# Altium PCB iTag3.PcbDoc
Units mil, origin at the board's own origin, x right, y up, seen from the top; angles counter-clockwise.
Board outline 1810 x 710 mil, 4 copper layers (Top Layer, Internal Plane 1, Internal Plane 2, Bottom Layer), stack 30.634 mil thick; 53 components, 41 nets, 244 pads, 24 vias.
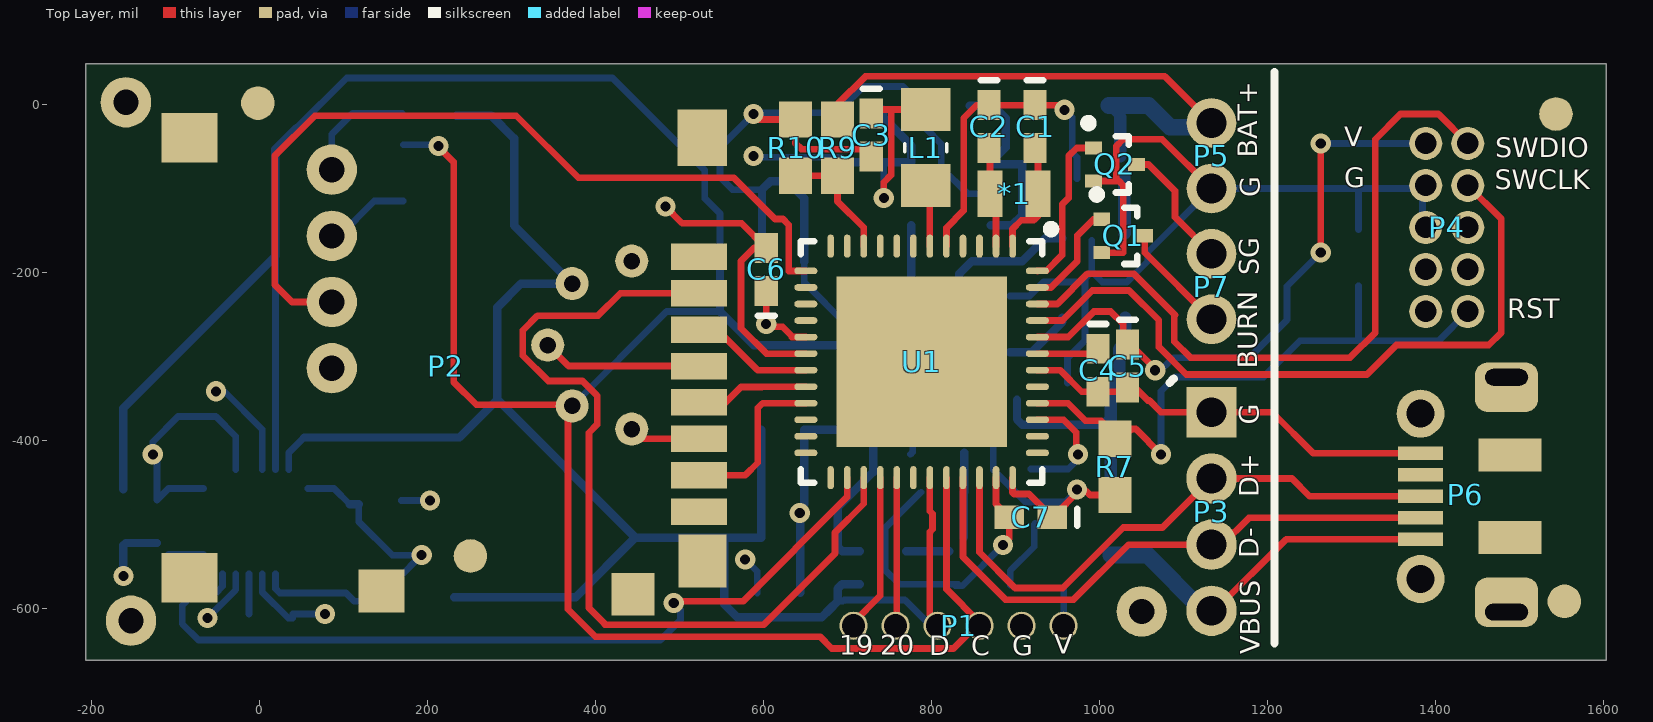
[diagram p0: Top Layer view]
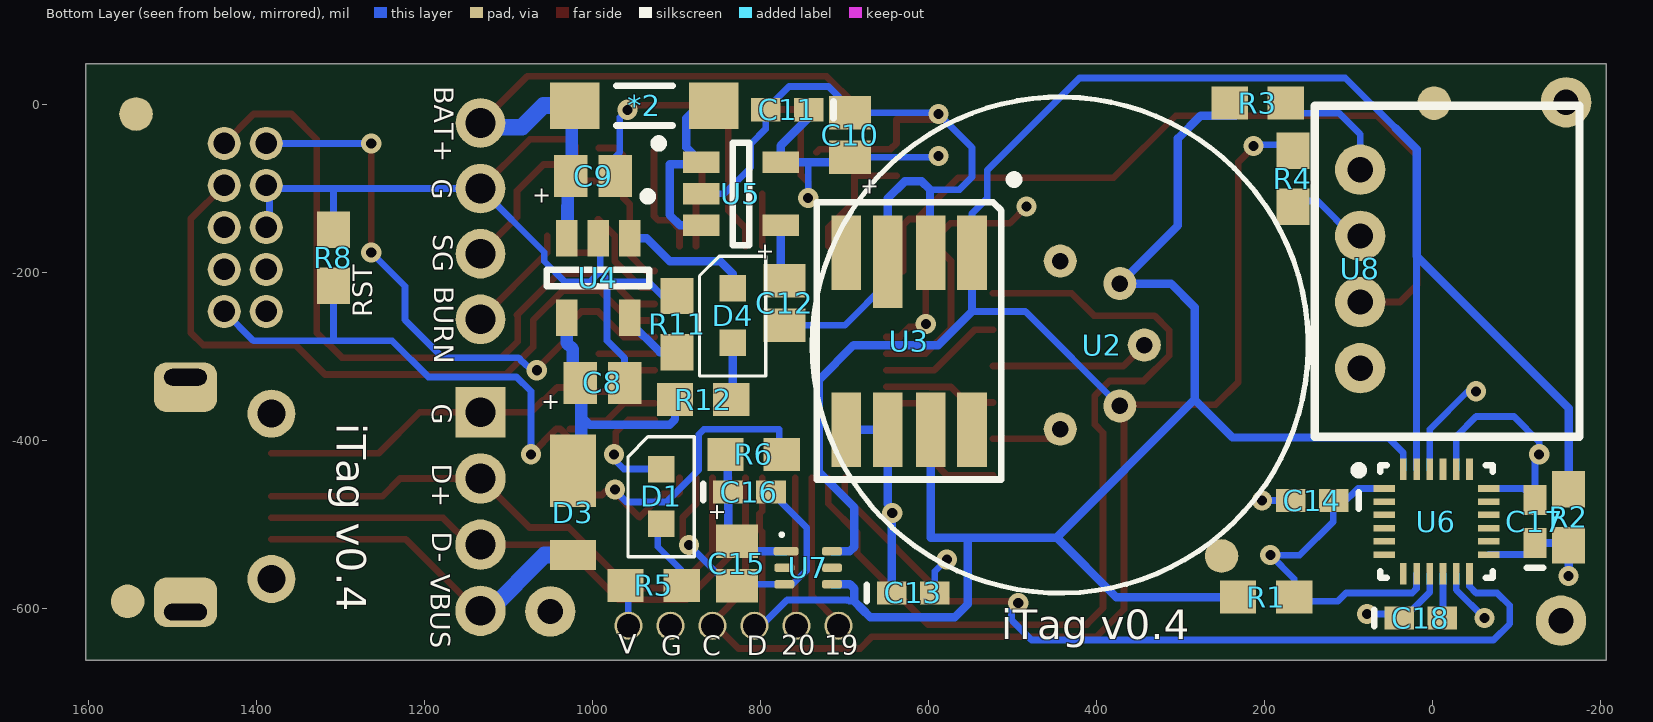
[diagram p1: Bottom Layer view, seen from below]
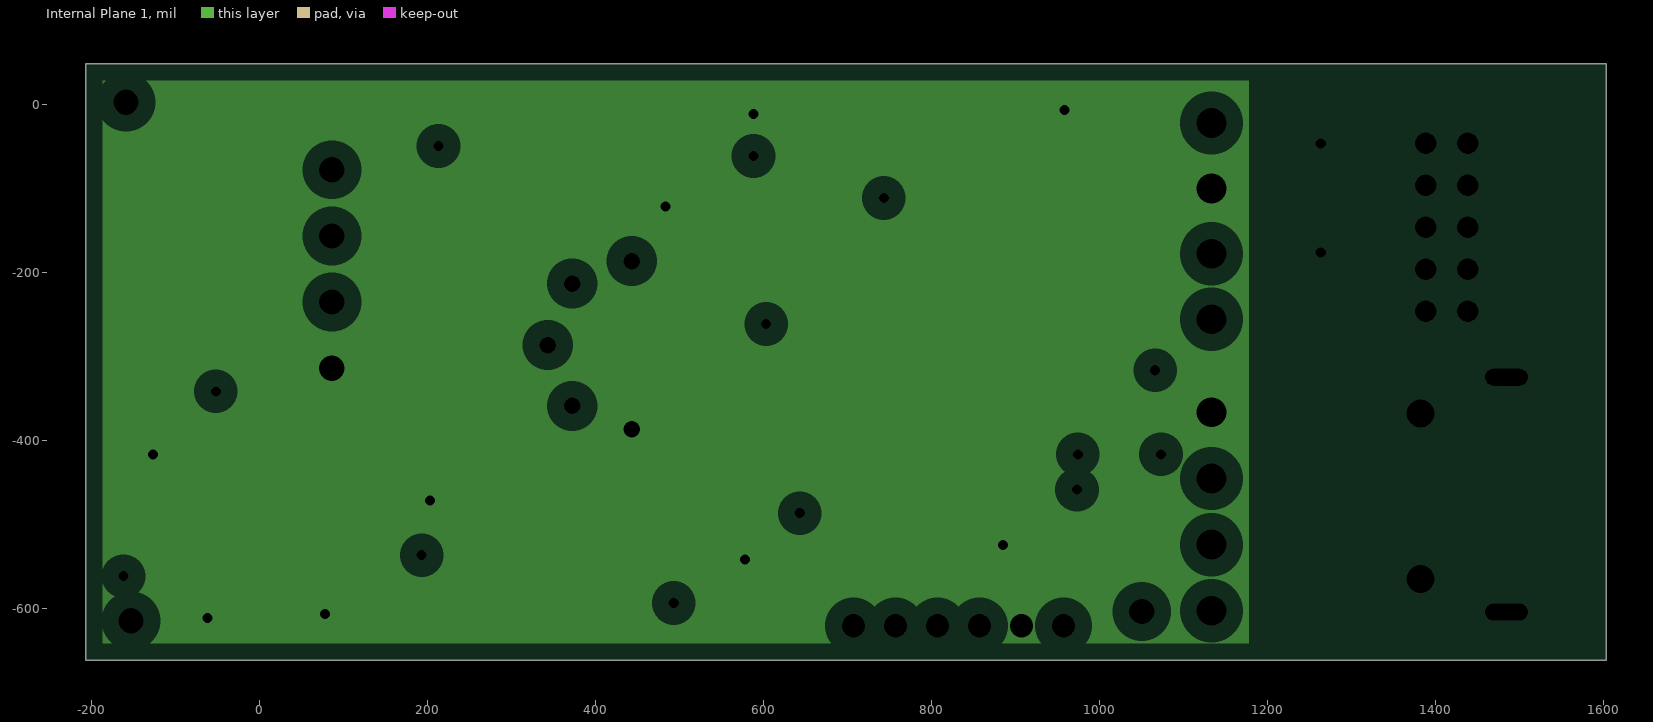
[diagram p2: Internal Plane 1, clearances drawn from the general rule]
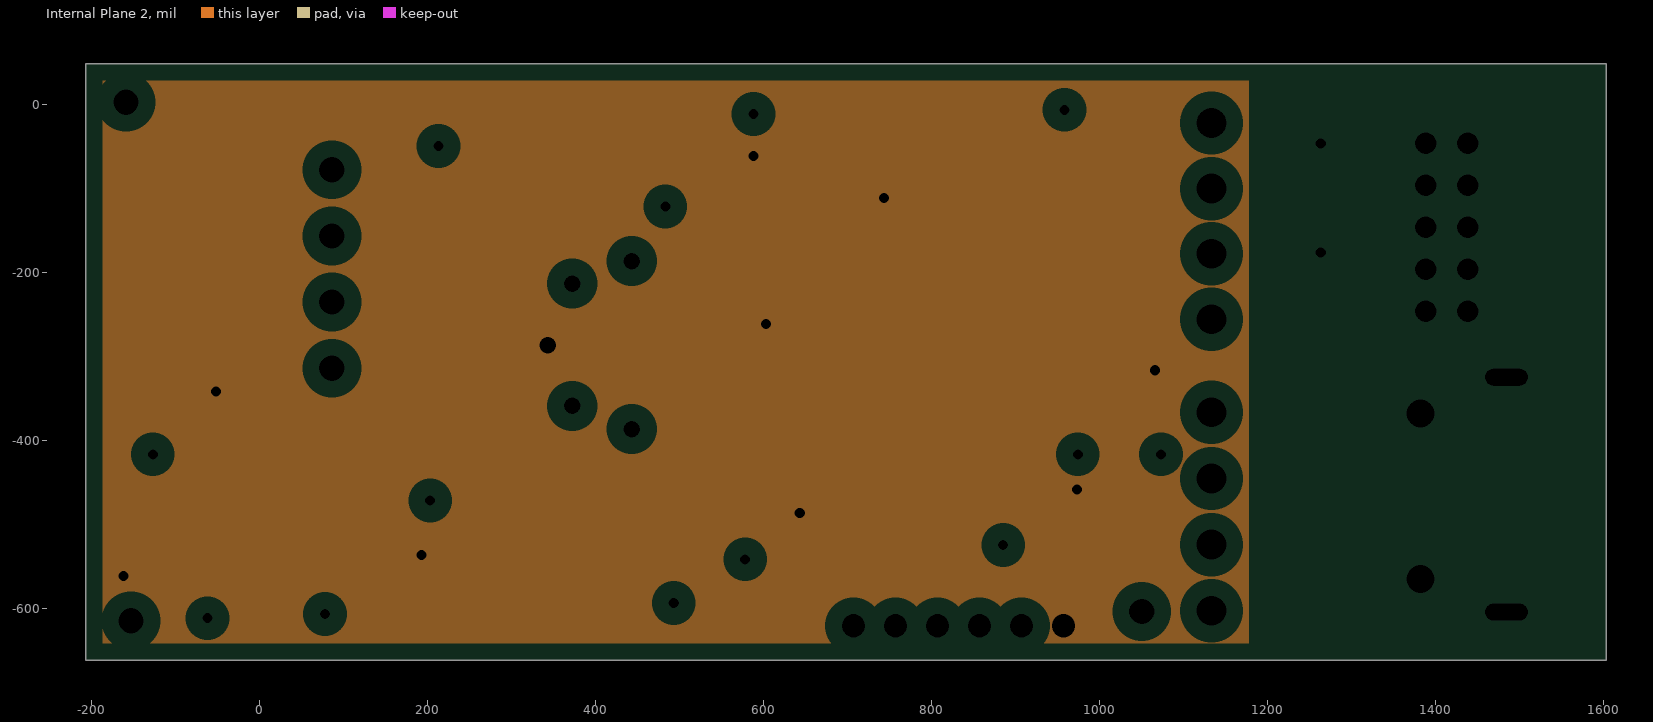
[diagram p3: Internal Plane 2, clearances drawn from the general rule]

## Layer stack, top to bottom
Top Solder: solder mask 0.4, Solder Resist, Dk 3.5
Top Layer: signal copper 1.4
Dielectric 1: core 10, FR-4, Dk 4.2
Internal Plane 1: plane copper 1.417, net GND
Dielectric 3: prepreg 5, Dk 4.2
Internal Plane 2: plane copper 1.417, net VCC
Dielectric 2: core 10, Dk 4.2
Bottom Layer: signal copper 1.4
Bottom Solder: solder mask 0.4, Solder Resist, Dk 3.5

## Board outline
-207,-661 -207,49 1603,49 1603,-661

## Design rules (kind name [scope] priority, off if disabled: settings)
Clearance [All] p1: gap=6
PlaneClearance [All] p1: clearance=20
PlaneConnect [All] p1: planeconnectstyle=Relief reliefexpansion=20 reliefentries=4 reliefconductorwidth=10 reliefairgap=10
PolygonConnect [All] p1: connectstyle=Relief reliefconductorwidth=10 reliefentries=4 polygonreliefangle="90 Angle" airgapwidth=10
RoutingVias [All] p1: holewidth=28 width=50 viastyle="Through Hole" minholewidth=28 minwidth=50 maxholewidth=28 maxwidth=50
SolderMaskExpansion [All] p1: expansion=4
Width [All] p1: maxlimit=50 minlimit=6 preferedwidth=8
27 further rules are at their usual default settings.

## Classes and differential pairs
component class iTag3: *1 *2 C1 C2 C3 C4 C5 C6 C7 C8 C9 C10 C11 C12 D3 D4 L1 P2 P3 P4 P5 P6 P7 Q1 Q2 R1 R2 R7 R8 R9 R10 R11 R12 U1 U4 U5
component class iTag3Sensors2: C13 C14 C15 C16 C17 C18 D1 P1 R3 R4 R5 R6 U2 U3 U6 U7 U8

## Components (designator, comment, footprint, x,y, rotation, side; value= is the part's Value field where it differs from the comment)
*1 "XTAL_ABS06" XTAL-ABS06 898,-106 r0 top
*2 "Reed_MK24" "Reed MK24-B-3" 938,-1 r180 bottom
C1 "12.5" 0402 923,-26 r270 top
C2 "12.5" 0402 868,-26 r270 top
C3 "0.1uF" 0402 728,-36 r270 top
C4 "0.1uF" 0402 998,-316 r270 top
C5 "0.1uF" 0402 1033,-311 r270 top
C6 "0.1 uF" 0402 603,-196 r90 top
C7 "0.1 uF" 0402 918,-491 r180 top
C8 "1uF" Tant0805 988,-331 r0 bottom
C9 "1uF" Tant0805 999,-85 r0 bottom
C10 "10uF" Tant0805 693,-36 r270 bottom
C11 "0.1uF" 0402 768,-6 r0 bottom
C12 "1uF" Tant0805 771,-236 r90 bottom
C13 "0.1uF" 0402 618,-581 r180 bottom
C14 "0.1uF" 0402 143,-471 r0 bottom
C15 "1uF" Tant0805 828,-546 r90 bottom
C16 "0.1uF" 0402 813,-461 r180 bottom
C17 "10nF" 0402 -122,-496 r90 bottom
C18 "0.1uF" 0402 14,-611 r180 bottom
D1 "LED_0603" Diode0603 918,-466 r90 bottom
D3 "Shottky" DFLS130 1023,-471 r270 bottom
D4 "LED_0603" Diode0603 833,-251 r90 bottom
L1 "300Ohm" "0805 (M2125) Ferrite" 793,-51 r90 top
P1 "Header 6x1 1.27mm" "Header6x1 1.27mm" 957,-620 r90 top
P2 "microSD reverse" miroSD_reverse 523,-181 r90 top
P3 "HDR_4x1_2mm" Hdr_4x1_2mm 1133,-366 r180 top
P4 "Cortex Debug" Header_2x5_50mil 1388,-246 r0 top
P5 "HDR_2x1_2mm" HDR_2x1_2mm 1133,-21 r180 top
P6 "microUSB" microUSB-B 1433,-466 r90 top
P7 "HDR_2x1_2mm" HDR_2x1_2mm 1133,-256 r0 top
Q1 "DMN5L06TK-7" SOT-523 1028,-156 r0 top
Q2 "DMN5L06TK-7" SOT-523 1018,-71 r0 top
R1 "4.7k" 3-0603 198,-586 r0 bottom
R2 "4.7k" 3-0603 -162,-491 r270 bottom
R3 "100X" 3-0603 208,2 r0 bottom
R4 "100X" 3-0603 166,-88 r90 bottom
R5 "330X" 3-0603 927,-572 r180 bottom
R6 "100x" 3-0603 808,-416 r0 bottom
R7 "10K" 3-0603 1018,-431 r90 top
R8 "Do not place" 3-0603 1308,-182 r90 bottom
R9 "100k" 3-0603 688,-51 r90 top
R10 "100k" 3-0603 638,-51 r270 top
R11 "10k" 3-0603 899,-261 r270 bottom
R12 "330X" 3-0603 868,-351 r180 bottom
U1 "ATSAMD21GA-MUT" QFN127P600-8N 788,-306 r270 top
U2 "Keller7LD" Keller7LD 443,-386 r90 bottom
U3 "MS5803_Press" MS5803_Press 548,-176 r270 bottom
U4 "MCP73831T-2DCI/OT" SOT-23-OT5_N 993,-206 r270 bottom
U5 "LP3985IM5-3.3" MF05A_N 823,-106 r180 bottom
U6 "MPU9250" MPU6500 -4.72,-496 r180 bottom
U7 "RGB light" ODFN 743,-551 r180 bottom
U8 "PRESENS O2 CUBE" PRESENS_O2 140,-395 r90 bottom

## Footprints (in the part's own frame and the unit in brackets; to place one, negate y for a bottom-side part, rotate by r counter-clockwise, add the part's x,y. Pads: shape width x height; smd on the part's side, far side on the other; paste and mask are expansions set on the pad)
3-0603 [mm] "Chip Resistor; Body 1.6 x 0.9 mm (LxW typ)"
  rect 1.1x1 smd: 1(-0.85,0) 2(0.85,0)
0402 [mm] "Chip Capacitor; Body 1.0 x 0.5 mm (LxW typ)"
  rect 0.9x0.7 smd: 1(-0.65,0) 2(0.65,0)
  silkscreen extent -1.4,-0.25 -1.4,0.25
"0805 (M2125) Ferrite" [mm] "Chip Resistor; Body 2.0 x 1.3 mm (LxW typ)"
  rect 1.3x1.5 smd: 1(-1.15,0) 2(1.15,0)
  silkscreen extent -0.13,-0.64 0.13,0.64, body extent -1.15,-0.72 1.15,0.73, height 0.81
DFLS130 [mm] "Diode"
  rect 0.9x1.4 smd: A(1.65,0)
  rect 2.2x1.4 smd: K(-0.9,0)
Diode0603 [mm]
  rect 0.8x0.8 smd: A(-0.825,0) K(0.825,0)
  silkscreen extent -1.83,-1 1.8,1
HDR_2x1_2mm [mm]
  round 1.5 hole 0.9: 1(0,0.016) 2(0,2)
Hdr_4x1_2mm [mil]
  rect 60x60 hole 35.43: 1(0,0)
  round 60 hole 35.43: 2(0,78.74) 3(0,157.48) 4(0,236.22)
  silkscreen extent 45,-40 50,-35
"Header6x1 1.27mm" [mm]
  round 0.85 hole 0.7: 1(0,0) 2(0,1.27) 3(0,2.54) 4(0,3.81) 5(0,5.08) 6(0,6.35)
Header_2x5_50mil [mm]
  round 1 hole 0.65: 1(0,0) 2(1.27,0) 3(0,1.27) 4(1.27,1.27) 5(0,2.54) 6(1.27,2.54) 7(0,3.81) 8(1.27,3.81) 9(0,5.08) 10(1.27,5.08)
Keller7LD [mm]
  round 1 hole 0.5: 1(5.08,0) 2(4.4,-1.8) 3(2.54,-2.54) 4(0.7,-1.8) 5(0,0)
  silkscreen extent -4.96,-7.5 10.04,7.5, body extent -4.94,-7.49 10,7.49, height 5.25
MF05A_N [mm] "SOT23, 5-Leads, Body 2.9x1.6mm, Pitch 0.95mm, Lead Span 2.8mm, IPC Medium Density"
  rect 1.1x0.65 smd: 1(-1.2,0.95) 2(-1.2,0) 3(-1.2,-0.95) 4(1.2,-0.95) 5(1.2,0.95)
  silkscreen extent -2.61,-1.55 0.25,1.65, body extent -0.9,-1.55 0.9,1.55, height 1.19
microUSB-B [mm]
  rect 0.4x1.35 smd: 1(-1.3,1.3) 2(-0.65,1.3) 3(0,1.3) 4(0.65,1.3) 5(1.3,1.3)
  rrect50% 1.5x1.9 hole 0.5 slot 1.3 at 90 deg copper offset 0.3,0: ""(-3.5,-1.3)
  round 1.45 hole 0.85: ""(-2.5,1.3) ""(2.5,1.3)
  rect 1x1.9 smd: ""(-1.25,-1.4) ""(1.25,-1.4)
  rrect50% 1.5x1.9 hole 0.5 slot 1.3 at 90 deg copper offset -0.3,0: ""(3.6,-1.3)
  body extent -4.1,-4.07 4.1,1.36, height 2.68
miroSD_reverse [mm] "5027740891"
  rect 1.5x1.7 smd: 0(-9.7,15.4) 0(3.6,15.4)
  rect 1.6x1.45 smd: 0(-9.2,-0.1)
  rect 1.7x1.5 smd: 0(3.6,-0.1)
  rect 0.8x1.68 smd: 1(0,0) 2(-1.1,0) 3(-2.2,0) 4(-3.3,0) 5(-4.4,0) 6(-5.5,0) 7(-6.6,0) 8(-7.7,0)
  rect 1.29x1.4 smd: 9(-10.1,9.6)
  rect 1.29x1.3 smd: 10(-10.2,2)
  body extent -10.05,-0.1 4.25,15.9, height 2.13
MPU6500 [mm] "QFN, 24-Leads, Body 3.00x3.00mm, Pitch 0.40mm, Thermal Pad 1.54x1.54mm, IPC Medium Density"
  rect 0.65x0.2 smd: 1(-1.575,1) 2(-1.575,0.6) 3(-1.575,0.2) 4(-1.575,-0.2) 5(-1.575,-0.6) 6(-1.575,-1) 13(1.575,-1) 14(1.575,-0.6) 15(1.575,-0.2) 16(1.575,0.2) 17(1.575,0.6) 18(1.575,1)
  rect 0.2x0.65 smd: 7(-1,-1.575) 8(-0.6,-1.575) 9(-0.2,-1.575) 10(0.2,-1.575) 11(0.6,-1.575) 12(1,-1.575) 19(1,1.575) 20(0.6,1.575) 21(0.2,1.575) 22(-0.2,1.575) 23(-0.6,1.575) 24(-1,1.575)
  silkscreen extent -2.48,-1.7 1.7,1.7, body extent -1.85,-1.25 1.25,1.85, height 0.9
MS5803_Press [mm]
  rect 2.25x0.9 smd: 1(0,0) 2(0,-1.25) 4(0,-3.8) 5(5.35,-3.8) 6(5.35,-2.55) 7(5.35,-1.25) 8(5.35,0)
  rect 2.8x0.9 smd: 3(0.275,-2.55)
  silkscreen extent -2.34,-4.7 6.86,1.4
ODFN [mm]
  rrect50% 0.75x0.25 smd: 1(-0.67,0.5)
  rrect50% 0.6x0.25 smd: 2(-0.72,0) 3(-0.72,-0.5) 4(0.72,-0.5) 5(0.72,0) 6(0.72,0.5)
  silkscreen extent -0.85,0.95 -0.75,1.05, body extent -0.82,-0.82 0.82,0.82, height 0.7
PRESENS_O2 [mil]
  round 60 hole 30: 1(81.5,-53.94) 2(160.24,-53.94) 3(238.98,-53.94) 4(317.72,-53.94)
  silkscreen extent 0,-315 394,0, body extent 0,-315 394,0, height 285
QFN127P600-8N [mm]
  oval 0.7x0.2 smd: 1(-3.5,2.75) 2(-3.5,2.25) 3(-3.5,1.75) 4(-3.5,1.25) 5(-3.5,0.75) 6(-3.5,0.25) 7(-3.5,-0.25) 8(-3.5,-0.75) 9(-3.5,-1.25) 10(-3.5,-1.75) 11(-3.5,-2.25) 12(-3.5,-2.75) 25(3.5,-2.75) 26(3.5,-2.25) 27(3.5,-1.75) 28(3.5,-1.25) 29(3.5,-0.75) 30(3.5,-0.25) 31(3.5,0.25) 32(3.5,0.75) 33(3.5,1.25) 34(3.5,1.75) 35(3.5,2.25) 36(3.5,2.75)
  oval 0.2x0.7 smd: 13(-2.75,-3.5) 14(-2.25,-3.5) 15(-1.75,-3.5) 16(-1.25,-3.5) 17(-0.75,-3.5) 18(-0.25,-3.5) 19(0.25,-3.5) 20(0.75,-3.5) 21(1.25,-3.5) 22(1.75,-3.5) 23(2.25,-3.5) 24(2.75,-3.5) 37(2.75,3.5) 38(2.25,3.5) 39(1.75,3.5) 40(1.25,3.5) 41(0.75,3.5) 42(0.25,3.5) 43(-0.25,3.5) 44(-0.75,3.5) 45(-1.25,3.5) 46(-1.75,3.5) 47(-2.25,3.5) 48(-2.75,3.5)
  rect 5.15x5.15 smd paste-1.778: 49(0,0)
  silkscreen extent -4.14,-3.65 3.65,4.04, body extent -3.5,-3.5 3.5,3.5, height 0.85
"Reed MK24-B-3" [mm] "Meder Reed Switch Surface Mount"
  rect 1.5x1.4 smd: 1(-2.1,0) 2(2.1,0)
  silkscreen extent -0.85,-0.6 0.85,0.6, body extent -2.75,-1.1 2.75,1.1, height 1.8
SOT-23-OT5_N [mm] "SOT23, 5-Leads, Body 2.9x1.7mm, Pitch 0.95mm, Lead Span 2.8mm, IPC Medium Density"
  rect 1.1x0.65 smd: 1(-1.2,0.95) 2(-1.2,0) 3(-1.2,-0.95) 4(1.2,-0.95) 5(1.2,0.95)
  silkscreen extent -2.59,-1.55 0.25,1.62, body extent -0.9,-1.55 0.9,1.55, height 1.45
SOT-523 [mm] "For Diodes Inc MOSFET DMN5L06TK"
  rect 0.51x0.4 smd: 1(-0.65,0.5) 2(-0.65,-0.5) 3(0.65,0)
  silkscreen extent -0.92,-0.85 0.42,1.37, body extent -0.43,-0.85 0.42,0.85, height 0.8
Tant0805 [mil]
  rect 40x50 smd: 1(-26.5,0) 2(26.5,0)
XTAL-ABS06 [mm]
  rect 0.75x1.4 smd: 1(-0.725,0) 2(0.725,0)

## Part data
C1 C2 C3 C4 C5 C6 C7 C11 C13 C14 C16 C17 C18: library part C0402, "Ceramic Chip Capacitor - Standard"
C8 C9 C10 C12 C15: library part Tant0805
D3: library part DFLS130
L1: library part "Ferrite 0805(M2125) 3A", "Ferrite 25mOhm@DC,  60 Ohm@100MHz"
P4: library part CortexDebug
P6: library part microUSB-B
Q1 Q2: library part "FET DMN5L06TK-7", "Ultra-low leakage Enhanced MOSFET"
R1 R2 R3 R4 R5 R6 R7 R8 R9 R10 R11 R12: library part ERJ3RK, "Precision Thick Film Chip Resistor, 10 Ohm to 1M Ohm Range, 1% and 0.5% Tolerance, 0603 Size, 0.063 W"
U1: library part ATSAMD21G18
U2: library part "Keller 7LD", "Keller Pressure/Temp"
U4: "Miniature Single-Cell, Fully Integrated Li-Ion, Li-Polymer Charge Management Controller, 4.2V, 5-Pin SOT-23, Industrial Temperature, Tape and Reel"
U5: "Micropower, 150mA Low-Noise Ultra Low-Dropout CMOS Voltage Regulator, 5-pin SOT-23"
U6: library part MPU-9250, "Invensense"
U7: library part ISL29125, "RGB light sensor"
U8: library part PRESENS_O2

## Free pads (board coordinates)
  round 60 hole 30: 0(-159,3) 0(-153,-614) 0(1050,-603)
  round 40 smd paste-20 mask+5: 0(-2,2) 0(251,-537) 0(1543,-11) 0(1553,-591)
  round 40 smd far side paste-20 mask+5: 0(-2,2) 0(251,-537) 0(1543,-11) 0(1553,-591)

## Via types
v1: diameter 24, hole 12, Top Layer to Bottom Layer, tented bottom, 24 vias

## Nets (pads, with @x,y where several pads share a name; then routed paths per layer and width w, separated by ;. In a path a pad name is that pad's centre, name@x,y a point inside that pad or via, vN(x,y) a via of type N, cw(c..) or ccw(c..) an arc to the next point about the centre after c; other vN are vias at no path point)
A4: R9.1 R10.2 U1.10 | length 146.6
  Top Layer w8: R10.2 R9.1 688,-115 719.1,-146.1 U1.10
BURN: Q1.1 U1.47 | length 119.1
  Top Layer w8: U1.47 942.04,-217.42 973.31,-186.15 973.31,-155.42 992.41,-136.32 Q1.1@993.31,-136.32
BWIRE: P7.1 Q1.3 | length 132.3
  Top Layer w8: Q1.3 1053.59,-175.96 P7.1
CS: P2.2 U1.27 | length 1063.4
  Top Layer w8: 410.94,-619 600,-619 685,-534 685,-509 719.1,-474.9 U1.27 ; 410.97,-617.97 392,-599 392,-390.37 401.82,-380.56 401.82,-346.14 384.43,-328.76 343.77,-328.76 313.31,-298.3 313.31,-268.68 331,-251 403,-251 429.69,-224.31 P2.2
D+: P3.2 P6.3 U1.34 | length 694
  Top Layer w8: U1.34 856.9,-532.54 899.36,-575 956,-575 1028,-503 1074.74,-503 P3.2 1228.74,-444.74 1250,-466 P6.3
D-: P3.3 P6.2 U1.33 | length 670.5
  Top Layer w8: U1.33 837.21,-538.31 887.9,-589 969,-589 1034.52,-523.48 P3.3@1103,-523.48 ; P3.3 1145.52,-523.48 1177.41,-491.59 P6.2
GND: C1.1 C2.1 C3.2 C4.2 C5.2 C6.2 C7.2 C8.1 C9.1 C10.1 C11.2 C12.1 C13.2 C14.2 C15.1 C16.2 C17.2 C18.1 P1.2 P2.6 P3.1 P4.5 P4.7 P5.2 P6.5 Q1.2 Q2.2 R8.2 R10.1 R11.1 U1.5 U1.18 U1.35 U1.42 U2.5 U3.2 U3.3 U4.2 U5.2 U6.9 U6.11 U6.18 U6.20 U7.3 U8.1 | length 4435.6
  Top Layer w8: U2.5@454.54,-397.53 P2.6 ; v1(483,-121) 503,-141 573.59,-141 C6.2 588.59,-170.41 573,-186 573,-266 603.16,-296.16 U1.18 ; v1@594.53,-17.53 R10.1 638,-46 644.81,-52.81 729.22,-52.81 C3.2@733,-56.59 ; U1.5 817.53,-146.47 838,-126 838,-16 853.59,-0.41 C2.1 C1.1 v1@952.41,-0.41 ; U1.35 876.58,-475.17 C7.2 892.41,-516.46 v1(885,-523.87) ; U1.42 952.84,-315.84 978.59,-341.59 C4.2 1028,-341.59 C5.2 1041.82,-336.59 1057.23,-352 1059,-352 1073,-366 P3.1 1205.36,-366 1254.18,-414.82 P6.5 ; Q2.2 1022.68,-90.69 1028,-96 1028,-176 1002.72,-176 Q1.2 ; 1019.55,-87.55 1019.55,-49.45 1028,-41 1074.26,-41 P5.2
  Bottom Layer w8: U6.18 -108.22,-456.63 C17.2 -122,-421 v1(-127,-416) -127,-401 -97,-371 -52,-371 -28.34,-394.66 U6.20 ; v1(-62,-611) -28.34,-577.34 U6.11 ; U6.9 3.16,-579.96 34.2,-611 C18.1 ; C18.1@39.59,-606 v1(78,-606) ; C14.2 v1(203,-471) ; v1(578,-541) 592.41,-555.41 C13.2 ; 598,-101 563,-101 548,-86 548,-51 v1(588,-11) 589.5,-9.5 C10.1 693,-4.11 718.89,21.78 765.93,21.78 793.59,-5.89 C11.2 793.59,-28.77 811.41,-46.59 811.41,-74.41 843,-106 U5.2 ; U3.3 648.39,-211.39 699.5,-262.5 C12.1@773,-262.5 ; C16.2 744.61,-503.79 744.61,-553.7 761.6,-570.68 U7.3 C15.1@831.18,-570.68 ; C15.1 836.37,-572.5 v1(885,-523.87) ; R11.1@893,-227.53 916.46,-227.53 933,-211 978,-211 982.39,-206.61 ; v1(958,-6) 967.15,-15.15 967.15,-56.65 973,-62.5 C9.1@973,-88 ; C8.1 961.5,-301.59 982.39,-280.7 982.39,-206.61 ; U4.2@990.5,-161.26 990.5,-198.5 ; R8.2 1308,-100.74 ; P4.5@1384.26,-142.26 1384.26,-99.74 P5.2 1057.2,-175.54 1057.2,-186.21 1032.4,-211 1003,-211 990.5,-198.5 ; 982.39,-206.61 990.5,-198.5
  Bottom Layer w10: U3.2 598,-175.21 598,-101 608,-91 628,-91 648.39,-111.39 U3.3
IMU_INT: U1.26 U6.12 | length 1009.4
  Top Layer w8: v1@493,-591 575.38,-591 699.42,-466.96 U1.26
  Bottom Layer w8: U6.12 -44.09,-573.09 -52,-581 -77,-581 -92,-596 -92,-617.77 -72.77,-637 477,-637 501,-613 501,-601 v1(493,-593)
LED1: D1.K U1.39 | length 149.4
  Top Layer w8: U1.39 956.9,-374.9 972,-390 972,-412 v1@978,-418
  Bottom Layer w8: D1.K 962.48,-433.52 v1@978,-418
  other v1: 974,-416
MISO: P2.7 U1.21 | length 200.7
  Top Layer w8: P2.7 578.16,-440.84 593,-426 593,-361 598.79,-355.21 U1.21
MOSI: P2.3 U1.19 | length 147.2
  Top Layer w8: P2.3 544.61,-267.61 592.84,-315.84 U1.19
Net*1_1: *1.1 C2.2 U1.2 | length 93
  Top Layer w8: *1.1@869.46,-101 C2.2@869.46,-68.05 ; U1.2 *1.1@876.58,-108.13
Net*1_2: *1.2 C1.2 U1.1 | length 134.4
  Top Layer w8: U1.1 896.27,-147.73 906.54,-137.46 921.54,-137.46 926.54,-132.46 *1.2 C1.2@926.54,-55.13
NetC4_1: C4.1 U1.43 | length 66.5
  Top Layer w8: U1.43 C4.1@992.25,-296.16
NetC8_2: C8.2 D3.K R12.1 U4.4 | length 438.1
  Bottom Layer w10: R12.1 901.46,-374.46 908,-381 1003,-381 1013,-371 ; D3.K@1014.5,-454.07 1013,-455.57 1013,-371 ; 1014.5,-369.5 1013,-371 ; C8.2 C8.2@1023,-322.5
  Bottom Layer w15: D3.K@1013,-459.46 1013,-374.9 ; 1013,-371 C8.2@1013,-332.5 ; C8.2@1023,-322.5 1023,-290.8 1030.4,-283.4 U4.4
NetC12_2: C12.2 U5.4 | length 63.3
  Bottom Layer w10: C12.2@775.76,-206.74 U5.4
NetC15_2: C15.2 C16.1 R6.2 U7.1 | length 151.8
  Bottom Layer w10: U7.1 C15.2@821.19,-531.31 ; C15.2@838,-514.5 C16.1@838,-461.59 ; C16.1 R6.2@838.59,-413.87
NetC18_2: C18.2 U6.10 | length 48
  Bottom Layer w8: C18.2@-12.59,-606 -12.59,-596 U6.10
NetD1_A: D1.A R5.2 | length 85.7
  Bottom Layer w8: R5.2 893.54,-554.46 922,-526 922,-499.48 D1.A@923,-498.48
NetD4_A: D4.A R12.2 | length 66
  Bottom Layer w10: R12.2@833,-349.46 D4.A
NetD4_K: D4.K U4.1 | length 157.6
  Bottom Layer w10: D4.K 833,-201 848,-186 908,-186 935.24,-158.76 U4.1
NetL1_1: L1.1 U1.6 | length 62.1
  Top Layer w8: U1.6 L1.1@797.84,-106.12
NetR3_1: R3.1 U8.4 | length 136.1
  Bottom Layer w8: U8.4 86.06,-34.94 111,-10 R3.1@169.54,-10
NetR4_1: R4.1 U8.3 | length 102.2
  Bottom Layer w8: U8.3 94.98,-156.02 136.54,-114.46 R4.1@171,-114.46
NetR11_2: R11.2 U4.5 | length 82.7
  Bottom Layer w10: R11.2@893,-294.46 919.54,-294.46 955.6,-258.4 U4.5
O2POW: U1.13 U8.2 | length 990.5
  Top Layer w8: U8.2 38.76,-234.76 18,-214 18,-61 66,-13 305.54,-13 379.27,-86.73 564.19,-86.73 613.46,-136 623,-136 629.73,-142.73 629.73,-197.73 U1.13
PA19: P1.6 U1.28 | length 185.4
  Top Layer w8: P1.6@707,-616 738.79,-584.21 U1.28
PA20: P1.5 U1.29 | length 170.7
  Top Layer w8: P1.5@758.47,-614.53 U1.29
PA21: U1.30
RESET: P4.2 R7.2 R8.1 U1.40 | length 730.5
  Top Layer w8: U1.40 962.21,-355.21 983,-376 1001.46,-376 1011.46,-386 R7.2@1026.46,-386 ; R7.2 1026.46,-397.54 1038,-386 1043,-386 v1(1073,-416)
  Bottom Layer w8: v1(1073,-416) 1073,-341 1090.04,-323.96 1195.04,-323.96 1238,-281 1308,-281 ; R8.1 1308,-281 ; P4.2 1403,-281 1308,-281
SCK: P2.5 U1.20 | length 135.9
  Top Layer w8: P2.5 554.77,-354.23 573,-336 598,-336 597.53,-335.53 U1.20
SCL: P1.3 R2.1 R4.2 U1.32 U2.4 U3.1 U6.23 U7.6 | length 3610.3
  Top Layer w8: v1@215,-52 231,-68 231,-330 258,-357 360.43,-357 367,-363.57 367,-600.46 399.54,-633 667,-633 681,-647 826,-647 857,-616 817.53,-576.53 U1.32
  Bottom Layer w8: U6.23 18.91,-180.09 ; 44,-27.77 103.77,32 420,32 530,-78 530,-111.46 548,-129.46 U3.1 ; R4.2@171,-47.54 v1@211.53,-47.54 ; U2.4 484.57,-246 548,-246
  Bottom Layer w10: R2.1 -162,-361 18.91,-180.09 18.91,-52.87 44,-27.77 ; U2.4 U2.4@375.56,-358.44 ; U3.1 548,-246 588,-286 688.98,-286 730.32,-327.34 730.32,-437.13 688,-479.46 688,-526 693.31,-531.31 U7.6
  other v1: 213,-49
SDA: P1.4 R1.2 R3.2 U1.31 U2.2 U3.7 U6.24 U7.4 | length 2124.5
  Top Layer w8: U1.31 797.84,-483.73 801,-486.89 801,-505.11 797.84,-508.27 797.84,-606.84 P1.4@807,-616
  Bottom Layer w8: U6.24 34.65,-414.35 53,-396 ; 678.61,-600.39 679.22,-601 ; 688,-591 694.19,-591 695.93,-589.27 768.07,-589.27 794.81,-616 P1.4@807,-616
  Bottom Layer w10: 53,-396 238,-396 283,-351 ; R1.2 376.43,-586 447.21,-515.21 ; R3.2@234.46,-13 276,-13 303,-40 303,-143.64 U2.2 311.23,-212.77 283,-241 283,-351 ; U3.7 597.21,-515.21 553,-515.21 ; U7.4 693.31,-570.68 688,-576 688,-591 678.61,-600.39 669.22,-609.78 568.48,-609.78 553,-594.3 553,-515.21 ; 283,-351 447.21,-515.21 ; 447.21,-515.21 553,-515.21
SWCLK: P4.8 U1.45 | length 839.6
  Top Layer w8: U1.45 955.69,-256.79 955.69,-256.42 991.11,-221 1034.89,-221 1070.31,-256.42 1070.31,-288.31 1103,-321 1318,-321 1353,-286 1463,-286 1478,-271 1478,-136 P4.8
SWDIO: P4.10 U1.46 | length 856.4
  Top Layer w8: U1.46 949.56,-237.1 985.66,-201 1040.34,-201 1089.47,-250.13 1089.47,-250.21 ; 1088.68,-251 1088.68,-281.68 1108,-301 1298,-301 1328,-271 1328,-41 1358,-11 1403,-11 P4.10
V_BATT: *2.1 C9.2 P5.1 R9.2 U4.3 | length 757.6
  Top Layer w8: R9.2 688,0.89 720.98,33.87 1077.5,33.87 P5.1
  Bottom Layer w10: *2.1@1010.68,-1 *2.1@1024.5,-14.82
  Bottom Layer w15: C9.2@1024.5,-61 *2.1@1024.5,-14.82 ; C9.2@1029,-84 U4.3@1029.5,-152.85
  Bottom Layer w20: *2.1@1010.68,-1 1058,-1 1083.63,-26.63 P5.1@1123,-26.63
VBUS: D3.A P3.4 P6.1 | length 417.7
  Top Layer w8: P3.4@1136.78,-602.22 1221.82,-517.18 P6.1
  Bottom Layer w20: D3.A@1013,-535.96 1056.74,-535.96 P3.4@1123,-602.22
VCC: C3.1 C5.1 C6.1 C7.1 C10.2 C11.1 C13.1 C14.1 C17.1 L1.2 P1.1 P2.4 P4.9 R1.1 R2.2 R5.1 R6.1 R7.1 U1.17 U1.36 U1.44 U2.3 U3.5 U3.6 U5.5 U6.1 U6.8 U6.13 U6.22 | length 2872.7
  Top Layer w8: U2.3 367.92,-310.92 P2.4 ; C6.1 v1(603,-261) 606.22,-264.22 622.43,-264.22 633.47,-275.26 633.47,-276.47 U1.17 ; C3.1@733.32,-5.72 L1.2 ; v1(743,-111) 743,-92.23 751.78,-83.45 751.78,-6.94 ; U1.36 896.27,-461.49 898,-463.22 915.92,-463.22 943.59,-490.89 C7.1 978,-456.59 978,-454 988.46,-464.46 R7.1 ; U1.44 962.53,-276.47 993,-246 1013,-246 1028,-261 C5.1@1028,-280.41 ; C5.1@1036.95,-285.41 1057.77,-306.23 ; v1(1263,-176) v1(1263,-46)
  Bottom Layer w8: -108.22,-535.37 U6.13 ; v1(-52,-341) -42,-341 3.16,-386.16 U6.22 ; U6.8 18.91,-575.91 24,-581 103,-581 113,-591 R1.1@159.54,-591 ; U6.1 88.63,-456.63 C14.1@107.41,-475.41 ; C14.1@118,-475.41 118,-496 158,-536 v1(193,-536) 164.54,-564.46 R1.1 ; v1(588,-61) 589.5,-62.5 C10.2 ; v1(743,-111) 743,-68.6 ; R6.1 777.31,-413.22 777.31,-386.31 867.26,-386.31 873.12,-392.17 873.12,-434.28 911.57,-472.73 959.27,-472.73 976,-456 v1@969,-456 ; P1.1 R5.1@957,-575.46 ; v1@1063,-316 1072.54,-316 1082.58,-305.96 1083.04,-305.96 1088,-301 1183,-301 1183,-296 1223,-256 1223,-216 v1(1263,-176) ; v1(1263,-46) P4.9
  Bottom Layer w10: v1(-162,-561) R2.2 ; R2.2@-159.13,-521.59 C17.1 ; C14.1@107.41,-475.41 C14.1@118,-475.41 ; C13.1 643.59,-480.41 648.39,-475.61 U3.6 U3.5 ; C10.2@699.1,-68.6 743,-68.6 U5.5 775.76,-48.76 742.41,-15.41 C11.1
  other v1: 643,-486 973,-458 1066,-316
VHF: Q2.1 U1.48 | length 191.7
  Top Layer w8: U1.48 925.86,-197.67 936.33,-197.67 955.31,-178.69 955.31,-118.69 963,-111 963,-61 972.68,-51.32 Q2.1
VHF_GND: P7.2 Q2.3 | length 151.7
  Top Layer w8: Q2.3 1058,-71 1089.47,-102.47 1089.47,-133.73 P7.2
VIN: *2.2 U5.1 U5.3 | length 250.5
  Bottom Layer w10: *2.2@845.32,-1 873,-1 888,-16 888,-50.84 U5.1 872.65,-71 908,-71 908,-131 895.6,-143.4 U5.3
pads on no net: P2.0 P2.1 P2.8 P2.9 P2.10 P4.1 P4.3 P4.4 P4.6 P6. P6.4 U1.3 U1.4 U1.7 U1.8 U1.9 U1.11 U1.12 U1.14 U1.15 U1.16 U1.22 U1.23 U1.24 U1.25 U1.37 U1.38 U1.41 U1.49 U2.1 U3.4 U3.8 U6.2 U6.3 U6.4 U6.5 U6.6 U6.7 U6.14 U6.15 U6.16 U6.17 U6.19 U6.21 U7.2 U7.5

## Polygon pours and split planes (outlines as drawn)
GND on Internal Plane 1 (split plane): 1178,-640.9 -186.9,-640.9 -186.9,28.9 1178,28.9
VCC on Internal Plane 2 (split plane): 1178,-640.9 -186.9,-640.9 -186.9,28.9 1178,28.9

## Other copper
Internal Plane 1 (plane layer: these items are gaps in the copper):
  pour cut-out: 1178,39 1603,39 1603,-641 1178,-641
Internal Plane 2 (plane layer: these items are gaps in the copper):
  pour cut-out: 1178,39 1603,39 1603,-641 1178,-641

## Silkscreen, mask and mechanical layers (free items; w line width, h text height)
Top Overlay:
  lines w10: 1208,-641 1208,39
  text "V" at 1291,-57 h40
  text "BAT+" at 1195,-63 h40 r90
  text "SWDIO" at 1471,-70 h40
  text "G" at 1291,-106 h40
  text "SWCLK" at 1470,-108 h40
  text "G" at 1198,-110 h40 r90
  text "SG" at 1197,-203 h40 r90
  text "RST" at 1485,-262 h40
  text "BURN" at 1195,-314 h40 r90
  text "G" at 1197,-381 h40 r90
  text "D+" at 1197,-467 h40 r90
  text "D-" at 1197,-540 h40 r90
  text "VBUS" at 1198,-654 h40 r90
  text "V" at 946,-661 h40
  text "19" at 690,-662 h40
  text "20" at 739,-662 h40
  text "D" at 797,-663 h40
  text "C" at 847,-663 h40
  text "G" at 896,-663 h40
Bottom Overlay:
  text "BAT+" at 1196,22 h40 r90
  text "G" at 1198,-88 h40 r90
  text "SG" at 1197,-154 h40 r90
  text "BURN" at 1196,-216 h40 r90
  text "RST" at 1254,-253 h40 r270
  text "G" at 1198,-356 h40 r90
  text "iTag v0.4" at 1316,-379 h60 r90
  text "D+" at 1198,-427 h40 r90
  text "D-" at 1198,-508 h40 r90
  text "VBUS" at 1200,-559 h40 r90
  text "iTag v0.4" at 513,-648 h60
  text "V" at 969,-661 h40
  text "19" at 724,-662 h40
  text "20" at 775,-662 h40
  text "D" at 816,-663 h40
  text "C" at 869,-663 h40
  text "G" at 918,-663 h40
Mechanical 1:
  the board outline again, w10

## Text inside footprints (layer, text, board x,y; h text height)
C8: Bottom Overlay "+" at 1038,-346 h19.68 r180
C9: Bottom Overlay "+" at 1049,-100 h19.68 r180
C10: Bottom Overlay "+" at 678,-86 h19.68 r90
C12: Bottom Overlay "+" at 786,-186 h19.68 r270
C15: Bottom Overlay "+" at 843,-496 h19.68 r270